# EAGLE board avr (EAGLE 5.06)
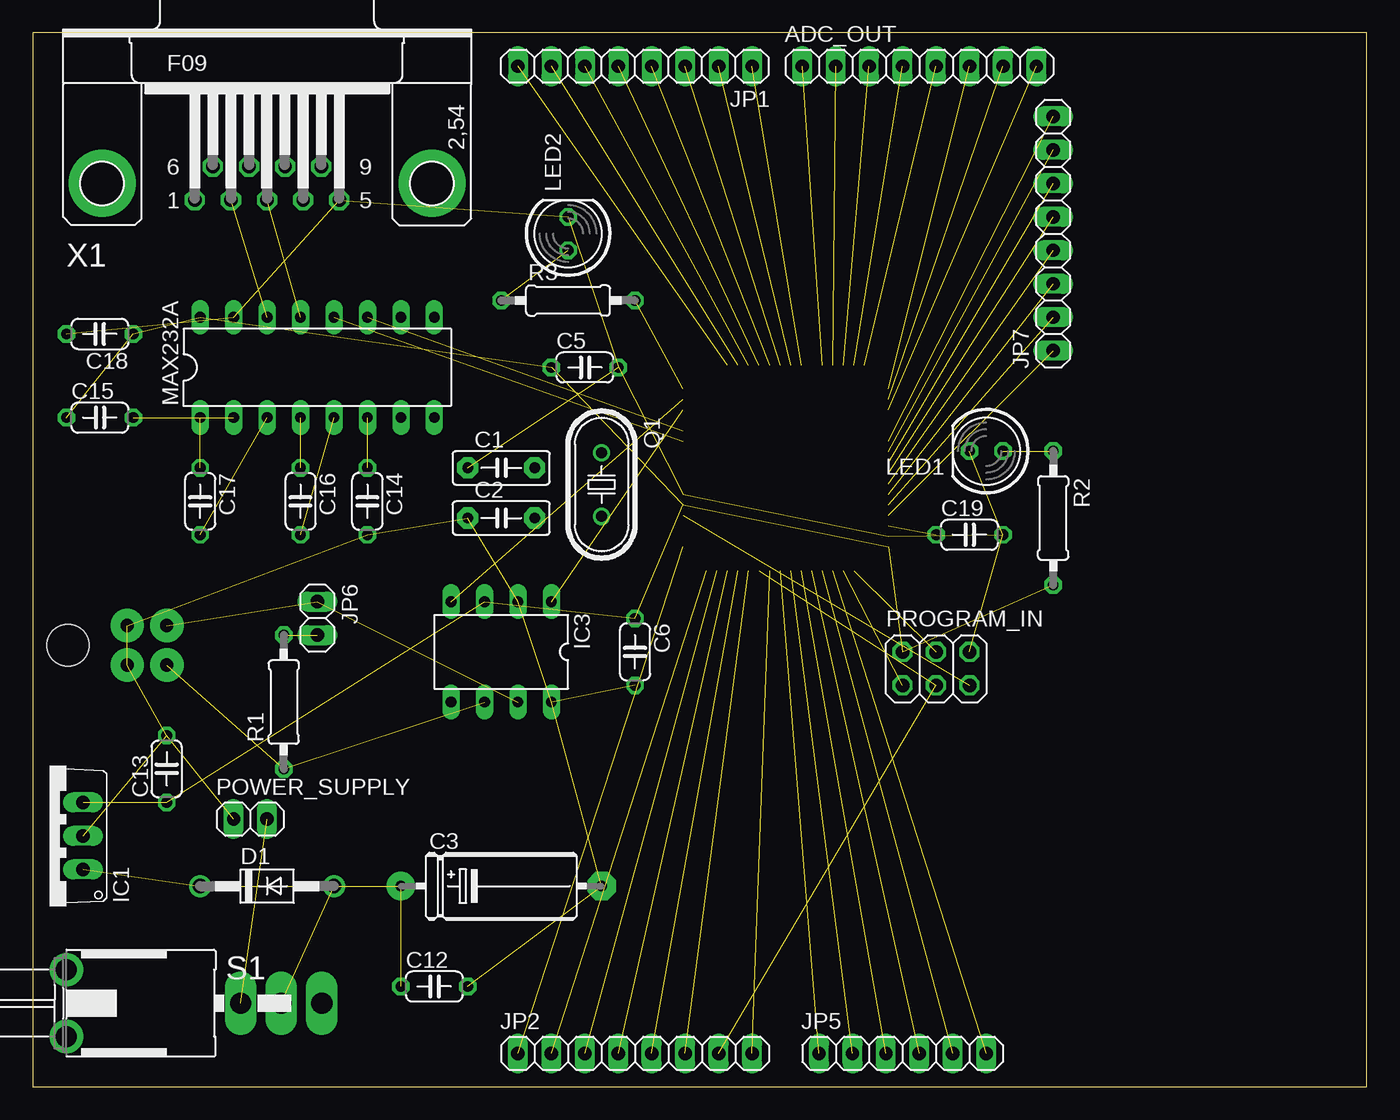
[diagram p0: board, top side]
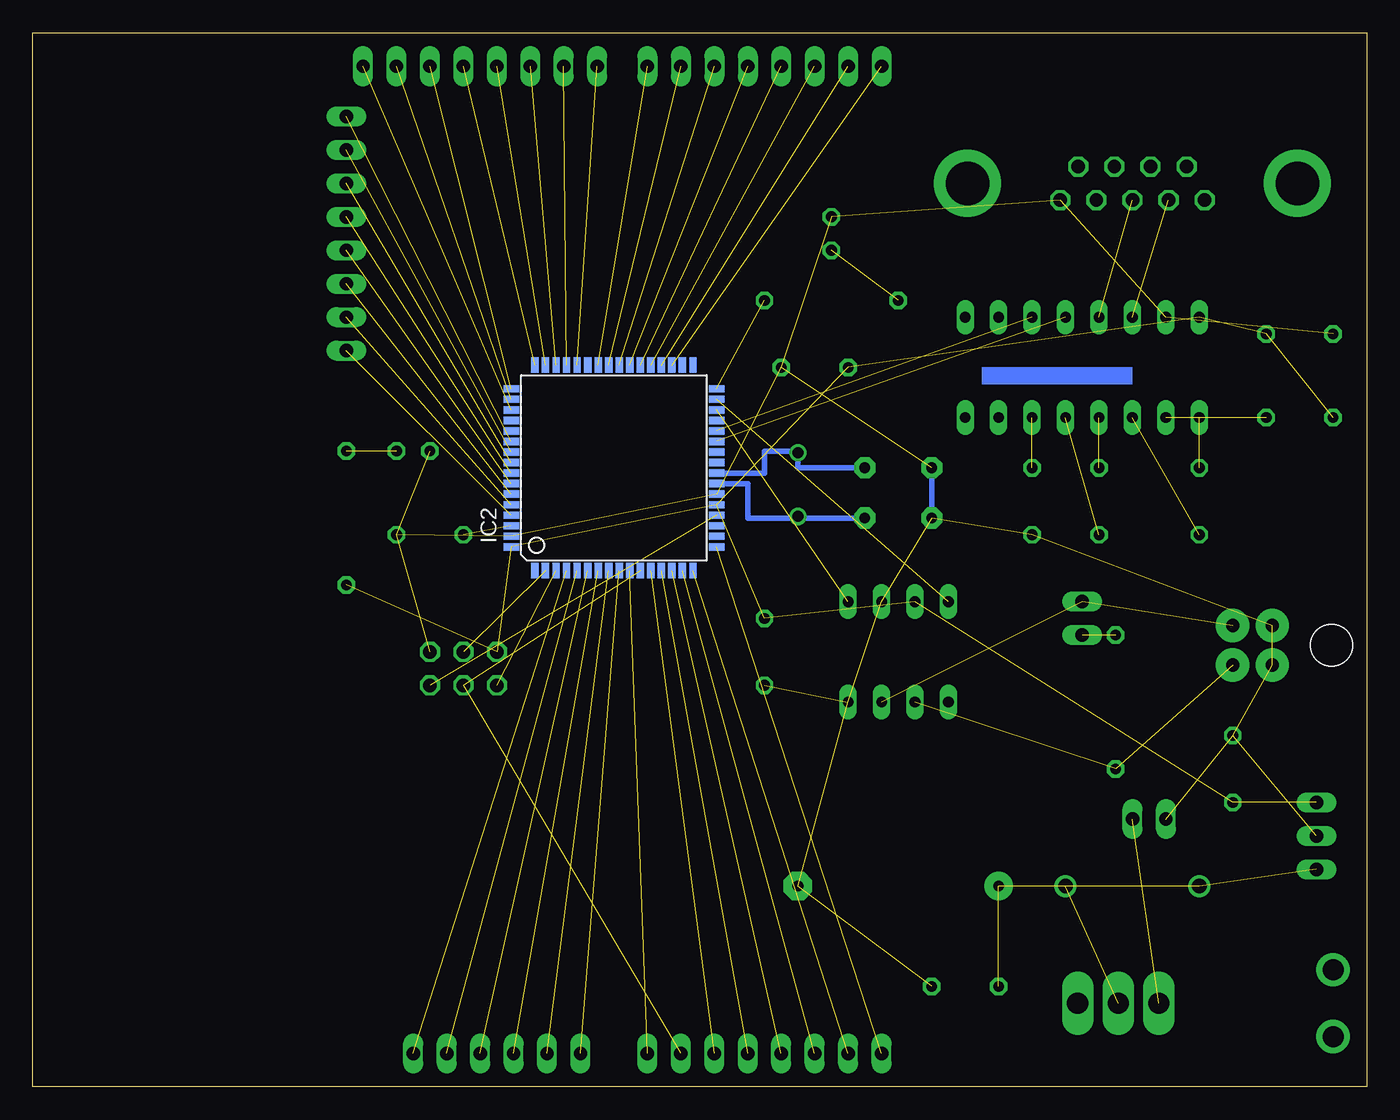
[diagram p1: board, bottom side, seen from below]

Size 101.27 x 80 mm. Coordinates in mm from the lower left corner, seen from the top.
Outline: 0,0 101.27,0 101.27,80 0,80 0,0
Copper layers (1*16): Top 0.035mm / dielectric 1.5mm / Bottom 0.035mm
Design rules "default": minimum track width 10mil, minimum drill 24mil, track to track 8mil, track to pad 8mil, pad to pad 8mil, via to via 8mil, smd to smd 8mil, copper to edge 40mil, drill to drill 8mil, minimum pad ring 10mil, minimum via ring 8mil, stop-mask expansion 4mil, vias tented up to drill 0mil, thermal gap 10mil
tRestrict: area 1.3,55.9 to 3.8,58.4; area 6.3,55.9 to 8.9,58.4; area 1.3,49.5 to 3.8,52.1; area 6.3,49.5 to 8.9,52.1; area 11.4,57.2 to 31.8,59.7; area 11.4,49.5 to 31.8,52.1; area 11.4,45.7 to 14,48.3; area 11.4,40.6 to 14,43.2; area 19.1,45.7 to 21.6,48.3; area 19.1,40.6 to 21.6,43.2; area 24.1,45.7 to 26.7,48.3; area 24.1,40.6 to 26.7,43.2; 45 more areas
vRestrict: area 48.3,38.1 to 66,55.9

## Footprints (pad centres in the part's own frame; a part is rotated, then mirrored left to right if it is on the bottom)
1X08 = drill 1.016 long: 1 -8.89,0; 2 -6.35,0; 3 -3.81,0; 4 -1.27,0; 5 1.27,0; 6 3.81,0; 7 6.35,0; 8 8.89,0
C5B2.5 = drill 0.813 pad 1.6 octagon: 1 -2.54,0; 2 2.54,0
E15-5 = drill 0.813 pad 2.159 round: + -7.62,0 | drill 0.813 pad 2.159 octagon: - 7.62,0
C050-024X044 = drill 0.813 octagon: 1 -2.54,0; 2 2.54,0
DO41-10 = drill 1.118 round: A 5.08,0; C -5.08,0
TO220V = drill 1.016 long: 1 -2.54,-2.54; 2 0,-2.54; 3 2.54,-2.54
TQFP64 = smd 1.194 x 0.559: 1 -7.8,6; 2 -7.8,5.2; 3 -7.8,4.4; 4 -7.8,3.6; 5 -7.8,2.8; 6 -7.8,2; 7 -7.8,1.2; 8 -7.8,0.4; 9 -7.8,-0.4; 10 -7.8,-1.2; 11 -7.8,-2; 12 -7.8,-2.8; 13 -7.8,-3.6; 14 -7.8,-4.4; 15 -7.8,-5.2; 16 -7.8,-6; 33 7.8,-6; 34 7.8,-5.2; 35 7.8,-4.4; 36 7.8,-3.6; 37 7.8,-2.8; 38 7.8,-2; 39 7.8,-1.2; 40 7.8,-0.4; 41 7.8,0.4; 42 7.8,1.2; 43 7.8,2; 44 7.8,2.8; 45 7.8,3.6; 46 7.8,4.4; 47 7.8,5.2; 48 7.8,6 | smd 0.559 x 1.194: 17 -6,-7.8; 18 -5.2,-7.8; 19 -4.4,-7.8; 20 -3.6,-7.8; 21 -2.8,-7.8; 22 -2,-7.8; 23 -1.2,-7.8; 24 -0.4,-7.8; 25 0.4,-7.8; 26 1.2,-7.8; 27 2,-7.8; 28 2.8,-7.8; 29 3.6,-7.8; 30 4.4,-7.8; 31 5.2,-7.8; 32 6,-7.8; 49 6,7.8; 50 5.2,7.8; 51 4.4,7.8; 52 3.6,7.8; 53 2.8,7.8; 54 2,7.8; 55 1.2,7.8; 56 0.4,7.8; 57 -0.4,7.8; 58 -1.2,7.8; 59 -2,7.8; 60 -2.8,7.8; 61 -3.6,7.8; 62 -4.4,7.8; 63 -5.2,7.8; 64 -6,7.8
DIL08 = drill 0.813 long: 1 -3.81,-3.81; 2 -1.27,-3.81; 3 1.27,-3.81; 4 3.81,-3.81; 5 3.81,3.81; 6 1.27,3.81; 7 -1.27,3.81; 8 -3.81,3.81
1X06 = drill 1.016 long: 1 -6.35,0; 2 -3.81,0; 3 -1.27,0; 4 1.27,0; 5 3.81,0; 6 6.35,0
1X02 = drill 1.016 long: 1 -1.27,0; 2 1.27,0
LED5MM = drill 0.813 octagon: A -1.27,0; K 1.27,0
DIL16 = drill 0.813 long: 1 -8.89,-3.81; 2 -6.35,-3.81; 3 -3.81,-3.81; 4 -1.27,-3.81; 5 1.27,-3.81; 6 3.81,-3.81; 7 6.35,-3.81; 8 8.89,-3.81; 9 8.89,3.81; 10 6.35,3.81; 11 3.81,3.81; 12 1.27,3.81; 13 -1.27,3.81; 14 -3.81,3.81; 15 -6.35,3.81; 16 -8.89,3.81
2X03 = drill 1.016 octagon: 1 -2.54,-1.27; 2 -2.54,1.27; 3 0,-1.27; 4 0,1.27; 5 2.54,-1.27; 6 2.54,1.27
HC49U70 = drill 0.813 round: 1 -2.413,0; 2 2.413,0
0207/10 = drill 0.813 octagon: 1 -5.08,0; 2 5.08,0
LPV-1 = drill 1.6 long: 1 0,13.24; 2 0,16.32; 3 0,19.4 | drill 1.6 pad 2.54 round: B -2.54,0; B1 2.54,0
MICROFIT4SOCK = drill 1 pad 2.54 round: PIN1 -2,0; PIN2 1,0; PIN3 -2,-3; PIN4 1,-3 | hole 3.2: -0.5,-7.5
F09HP = drill 1.016 octagon: 1 -5.486,-1.27; 2 -2.743,-1.27; 3 0,-1.27; 4 2.743,-1.27; 5 5.486,-1.27; 6 -4.115,1.27; 7 -1.372,1.27; 8 1.372,1.27; 9 4.115,1.27 | drill 3.302 pad 5.08 round: G1 -12.522,0; G2 12.522,0

## Placement (x,y rotation side)
ADC_OUT  [1X08]  67.31,77.47 0 top
C1  22pF  [C5B2.5]  35.56,46.99 0 top
C2  22pF  [C5B2.5]  35.56,43.18 0 top
C3  330uF  [E15-5]  35.56,15.24 0 top
C5  100nF  [C050-024X044]  41.91,54.61 0 top
C6  100nF  [C050-024X044]  45.72,33.02 270 top
C12  100nF  [C050-024X044]  30.48,7.62 0 top
C13  100nF  [C050-024X044]  10.16,24.13 90 top
C14  100nF  [C050-024X044]  25.4,44.45 270 top
C15  100nF  [C050-024X044]  5.08,50.8 0 top
C16  100nF  [C050-024X044]  20.32,44.45 270 top
C17  100nF  [C050-024X044]  12.7,44.45 270 top
C18  100nF  [C050-024X044]  5.08,57.15 180 top
C19  100nF  [C050-024X044]  71.12,41.91 0 top
D1  1N4004  [DO41-10]  17.78,15.24 0 top
IC1  7805TV  [TO220V]  1.27,19.05 90 top
IC2  MEGA128-A  [TQFP64]  57.15,46.99 90 bottom
IC3  PCA82C250  [DIL08]  35.56,33.02 180 top
JP1  [1X08]  45.72,77.47 180 top
JP2  [1X08]  45.72,2.54 0 top
JP5  [1X06]  66.04,2.54 0 top
JP6  [1X02]  21.59,35.56 270 top
JP7  [1X08]  77.47,64.77 90 top
LED1  [LED5MM]  72.39,48.26 180 top
LED2  [LED5MM]  40.64,64.77 90 top
MAX232A  MAX232  [DIL16]  21.59,54.61 0 top
POWER_SUPPLY  [1X02]  16.51,20.32 0 top
PROGRAM_IN  [2X03]  68.58,31.75 0 top
Q1  18.4320 MHz  [HC49U70]  43.18,45.72 270 top
R1  120  [0207/10]  19.05,29.21 90 top
R2  250  [0207/10]  77.47,43.18 270 top
R3  270  [0207/10]  40.64,59.69 0 top
S1  [LPV-1]  2.54,6.35 270 top
U$1  MICROFIT4  [MICROFIT4SOCK]  10.16,33.02 270 top
X1  [F09HP]  17.78,68.58 0 top

## Library data of the parts
ADC_OUT JP1 JP2 JP5-JP7 POWER_SUPPLY PROGRAM_IN = pinhead
C1 C2 = capacitor-wima
C3 C5 C6 C12-C19 = rcl
D1 = diode
IC1 = linear
IC2 = atmel
IC3 = micro-philips
LED1 LED2 = led
MAX232A = maxim
Q1 = crystal
R1-R3 = resistor
S1 = switch
U$1 = UNICORN
X1 = con-subd

## Nets
+5V: C5.1 C6.1 C13.1 C15.1 C18.1 IC1.3 IC2.21 IC2.64 IC3.3 MAX232A.16 PROGRAM_IN.2 R2.2
GND1: IC2.53
MISO: IC2.3 PROGRAM_IN.1
MOSI: IC2.2 PROGRAM_IN.4
N$1: C1.2 IC2.24 Q1.1
N$2: C2.2 IC2.23 Q1.2
N$3: IC2.9 JP5.1
N$4: D1.A S1.2
N$5: POWER_SUPPLY.2 S1.1
N$6: LED1.A R2.1
N$7: IC2.35 JP1.8
N$8: LED2.A R3.1
N$9: ADC_OUT.1 IC2.44
N$10: C19.1 IC2.62
N$11: ADC_OUT.2 IC2.45
N$12: ADC_OUT.3 IC2.46
N$13: ADC_OUT.4 IC2.47
N$14: ADC_OUT.5 IC2.48
N$15: ADC_OUT.6 IC2.49
N$16: ADC_OUT.7 IC2.50
N$17: ADC_OUT.8 IC2.51
N$18: IC2.16 JP2.2
N$19: IC2.17 JP2.1
N$20: IC2.54 JP7.8
N$21: MAX232A.13 X1.3
N$22: IC2.13 JP2.5
N$23: IC2.36 JP1.7
N$24: IC2.37 JP1.6
N$25: IC2.38 JP1.5
N$26: IC2.39 JP1.4
N$27: IC2.40 JP1.3
N$28: IC2.41 JP1.2
N$29: IC2.42 JP1.1
N$30: IC2.8 JP5.2
N$31: IC2.7 JP5.3
N$32: IC2.6 JP5.4
N$33: MAX232A.14 X1.2
N$34: IC2.5 JP5.5
N$35: C17.1 MAX232A.1
N$36: C17.2 MAX232A.3
N$37: C16.1 MAX232A.4
N$38: C16.2 MAX232A.5
N$39: C14.1 MAX232A.6
N$40: IC2.14 JP2.4
N$41: C15.2 MAX232A.2
N$42: IC2.4 JP5.6
N$43: IC2.32 R3.2
N$44: IC2.55 JP7.7
N$45: IC2.10 JP2.8
N$46: IC2.15 JP2.3
N$47: IC2.12 JP2.6
N$48: IC2.56 JP7.6
N$49: IC2.57 JP7.5
N$50: JP6.2 R1.2
N$51: IC3.6 R1.1 U$1.PIN2
N$52: IC3.7 JP6.1 U$1.PIN1
N$53: IC2.58 JP7.4
N$54: IC2.59 JP7.3
N$55: IC2.60 JP7.2
N$56: IC2.61 JP7.1
PE: C1.1 C2.1 C3.- C5.2 C6.2 C12.2 C13.2 C14.2 C18.2 C19.2 IC1.2 IC2.22 IC2.63 IC3.2 IC3.8 LED1.K LED2.K MAX232A.15 POWER_SUPPLY.1 PROGRAM_IN.6 U$1.PIN3 U$1.PIN4 X1.5
RESET: IC2.20 PROGRAM_IN.5
RXCAN: IC2.31 IC3.4
RXD1: IC2.27 MAX232A.12
SCK: IC2.11 JP2.7 PROGRAM_IN.3
TXCAN: IC2.30 IC3.1
TXD1: IC2.28 MAX232A.11
VCC: C3.+ C12.1 D1.C IC1.1
VCC1: IC2.52

## Tracks (layer width: path | path; a pad name or v marks a point on that pad's centre or on a via)
+5V  (11 unrouted)
MISO  (1 unrouted)
MOSI  (1 unrouted)
N$1
  Bottom 0.406: IC2.24 45.72,46.59 45.72,48.26 43.18,48.26 | 43.18,48.26 Q1.1 43.18,48.26 | 43.18,48.26 43.18,46.99 C1.2
N$2
  Bottom 0.406: IC2.23 46.99,45.79 46.99,43.18 43.18,43.18 | 43.18,43.18 Q1.2 43.18,43.18 | C2.2 43.18,43.18
N$3  (1 unrouted)
N$4  (1 unrouted)
N$5  (1 unrouted)
N$6  (1 unrouted)
N$7  (1 unrouted)
N$8  (1 unrouted)
N$9  (1 unrouted)
N$10  (1 unrouted)
N$11  (1 unrouted)
N$12  (1 unrouted)
N$13  (1 unrouted)
N$14  (1 unrouted)
N$15  (1 unrouted)
N$16  (1 unrouted)
N$17  (1 unrouted)
N$18  (1 unrouted)
N$19  (1 unrouted)
N$20  (1 unrouted)
N$21  (1 unrouted)
N$22  (1 unrouted)
N$23  (1 unrouted)
N$24  (1 unrouted)
N$25  (1 unrouted)
N$26  (1 unrouted)
N$27  (1 unrouted)
N$28  (1 unrouted)
N$29  (1 unrouted)
N$30  (1 unrouted)
N$31  (1 unrouted)
N$32  (1 unrouted)
N$33  (1 unrouted)
N$34  (1 unrouted)
N$35  (1 unrouted)
N$36  (1 unrouted)
N$37  (1 unrouted)
N$38  (1 unrouted)
N$39  (1 unrouted)
N$40  (1 unrouted)
N$41  (1 unrouted)
N$42  (1 unrouted)
N$43  (1 unrouted)
N$44  (1 unrouted)
N$45  (1 unrouted)
N$46  (1 unrouted)
N$47  (1 unrouted)
N$48  (1 unrouted)
N$49  (1 unrouted)
N$50  (1 unrouted)
N$51  (2 unrouted)
N$52  (2 unrouted)
N$53  (1 unrouted)
N$54  (1 unrouted)
N$55  (1 unrouted)
N$56  (1 unrouted)
PE  (21 unrouted)
  Bottom 0.406: C2.1 C1.1
RESET  (1 unrouted)
RXCAN  (1 unrouted)
RXD1  (1 unrouted)
SCK  (2 unrouted)
TXCAN  (1 unrouted)
TXD1  (1 unrouted)
VCC  (3 unrouted)
(copper drawn outside any net)
  shapes: Bottom area x1